# EAGLE board StepperMotorDriver (EAGLE 9.5.2)
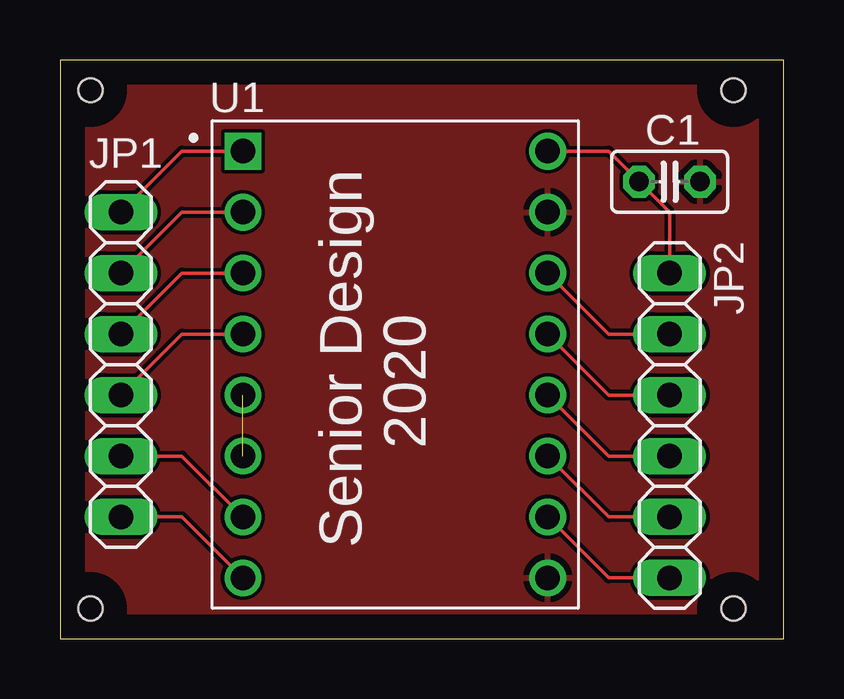
[diagram p0: board, top side]
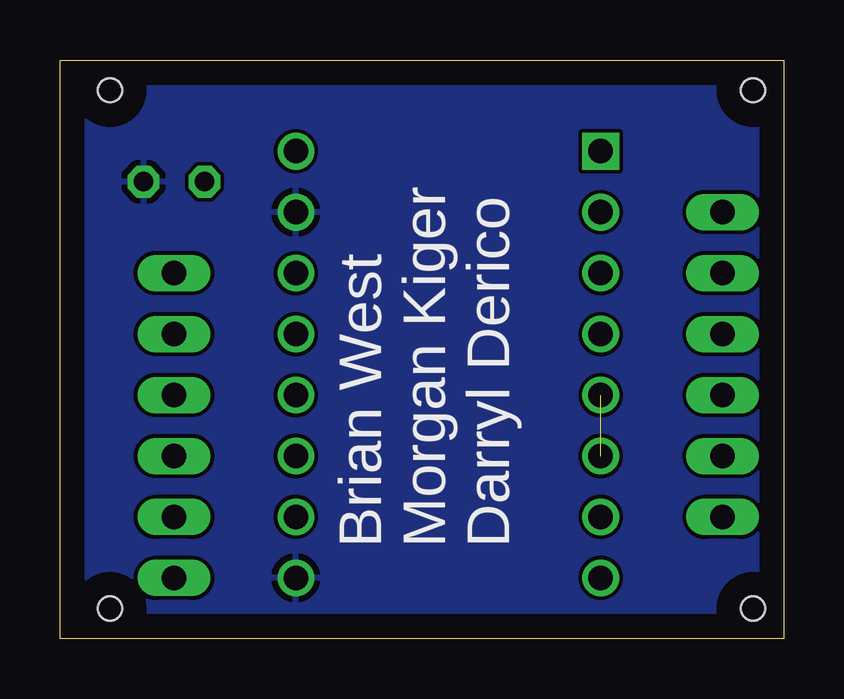
[diagram p1: board, bottom side, seen from below]

Size 30.15 x 24.12 mm. Coordinates in mm from the lower left corner, seen from the top.
Outline: 0,0 30.15,0 30.15,24.12 0,24.12 0,0
Copper layers (1*16): Top 0.035mm / dielectric 1.5mm / Bottom 0.035mm
Design rules "default": minimum track width 6mil, minimum drill 0.35mm, track to track 6mil, track to pad 6mil, pad to pad 6mil, via to via 6mil, smd to smd 6mil, copper to edge 40mil, drill to drill 6mil, minimum pad ring 10mil, minimum via ring 8mil, stop-mask expansion 4mil, vias tented up to drill 0mil, thermal gap 10mil
Holes 1 mm at 1.27,22.86 1.27,1.27 28.07,22.86 28.07,1.27

## Footprints (pad centres in the part's own frame; a part is rotated, then mirrored left to right if it is on the bottom)
C025-025X050 = drill 0.813 octagon: 1 -1.27,0; 2 1.27,0
1X06 = drill 1.016 long: 1 -6.35,0; 2 -3.81,0; 3 -1.27,0; 4 1.27,0; 5 3.81,0; 6 6.35,0
MODULE_A4988_STEPPER_MOTOR_DRIVER_CARRIER = drill 1.02 square: 1 -6.35,8.89 | drill 1.02: 2 -6.35,6.35; 3 -6.35,3.81; 4 -6.35,1.27; 5 -6.35,-1.27; 6 -6.35,-3.81; 7 -6.35,-6.35; 8 -6.35,-8.89; 9 6.35,-8.89; 10 6.35,-6.35; 11 6.35,-3.81; 12 6.35,-1.27; 13 6.35,1.27; 14 6.35,3.81; 15 6.35,6.35; 16 6.35,8.89

## Placement (x,y rotation side)
C1  [C025-025X050]  25.4,19.05 0 top
JP1  [1X06]  2.54,11.43 270 top
JP2  [1X06]  25.4,8.89 270 top
U1  A4988_STEPPER_MOTOR_DRIVER_CARRIER  [MODULE_A4988_STEPPER_MOTOR_DRIVER_CARRIER]  13.97,11.43 0 top

## Library data of the parts
C1 = rcl; SPICEPREFIX: C
JP1 JP2 = pinhead
U1 = A4988_STEPPER_MOTOR_DRIVER_CARRIER; AVAILABILITY: Unavailable; DESCRIPTION: Stepper Motor Driver; MF: Pololu; MP: A4988 STEPPER MOTOR DRIVER CARRIER; PACKAGE: None; PRICE: None

## Nets
1A: JP2.4 U1.12
1B: JP2.5 U1.11
2A: JP2.3 U1.13
2B: JP2.2 U1.14
DIR: JP1.6 U1.8
EN: JP1.1 U1.1
GND: C1.2 U1.9 U1.15
MS1: JP1.2 U1.2
MS2: JP1.3 U1.3
MS3: JP1.4 U1.4
N$1: U1.5 U1.6
STP: JP1.5 U1.7
VDD: JP2.6 U1.10
VMOT: C1.1 JP2.1 U1.16

## Tracks (layer width: path | path; a pad name or v marks a point on that pad's centre or on a via)
1A
  Top 0.152: JP2.4 22.86,7.62 U1.12
1B
  Top 0.152: JP2.5 22.86,5.08 U1.11
2A
  Top 0.152: JP2.3 22.86,10.16 U1.13
2B
  Top 0.152: JP2.2 22.86,12.7 U1.14
DIR
  Top 0.152: JP1.6 5.08,5.08 U1.8
EN
  Top 0.152: JP1.1 5.08,20.32 U1.1
GND
  pour Top: -1.27,25.4 31.75,25.4 31.75,-1.27 -1.27,-1.27
  pour Bottom: -1.27,25.4 31.75,25.4 31.75,-1.27 -1.27,-1.27
MS1
  Top 0.152: JP1.2 5.08,17.78 U1.2
MS2
  Top 0.152: JP1.3 5.08,15.24 U1.3
MS3
  Top 0.152: JP1.4 5.08,12.7 U1.4
N$1  (1 unrouted)
STP
  Top 0.152: JP1.5 5.08,7.62 U1.7
VDD
  Top 0.152: JP2.6 22.86,2.54 U1.10
VMOT
  Top 0.152: U1.16 22.86,20.32 C1.1 25.4,17.78 JP2.1

## Text on the board
tPlace: Senior Design / 2020
bPlace: Brian West / Morgan Kiger / Darryl Derico